# Altium PCB Emergency_Button_v2_1.PcbDoc
Units mm, origin at the board's own origin, x right, y up, seen from the top; angles counter-clockwise.
Board outline 52.15 x 52.96 mm, 2 copper layers (Top Layer, Bottom Layer); 43 components, 34 nets, 212 pads, 45 vias.
Unrouted connection lines stored in the file: 9.
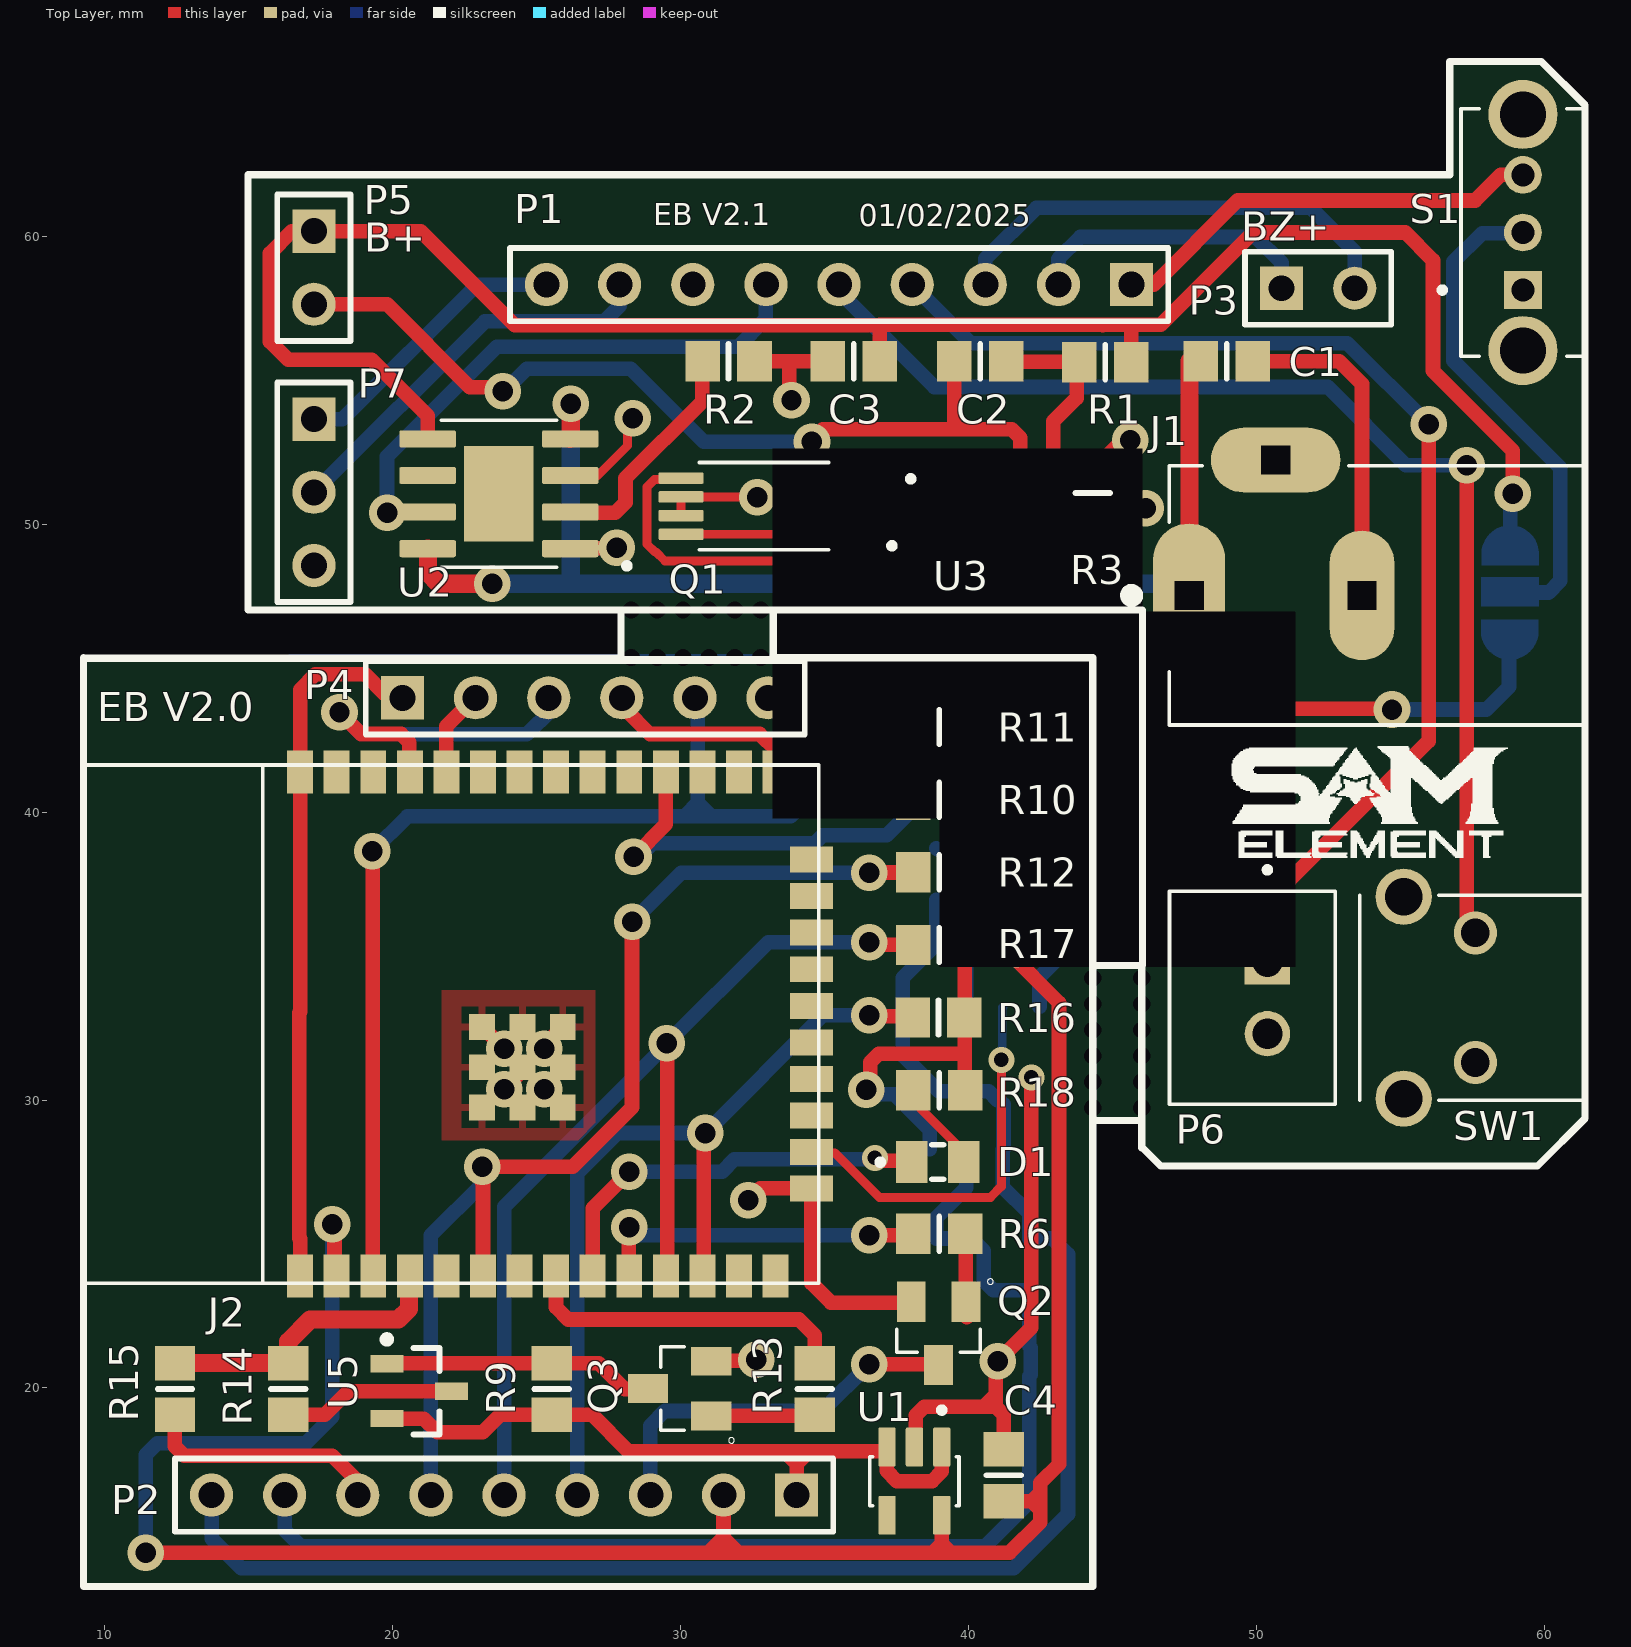
[diagram p0: Top Layer view]
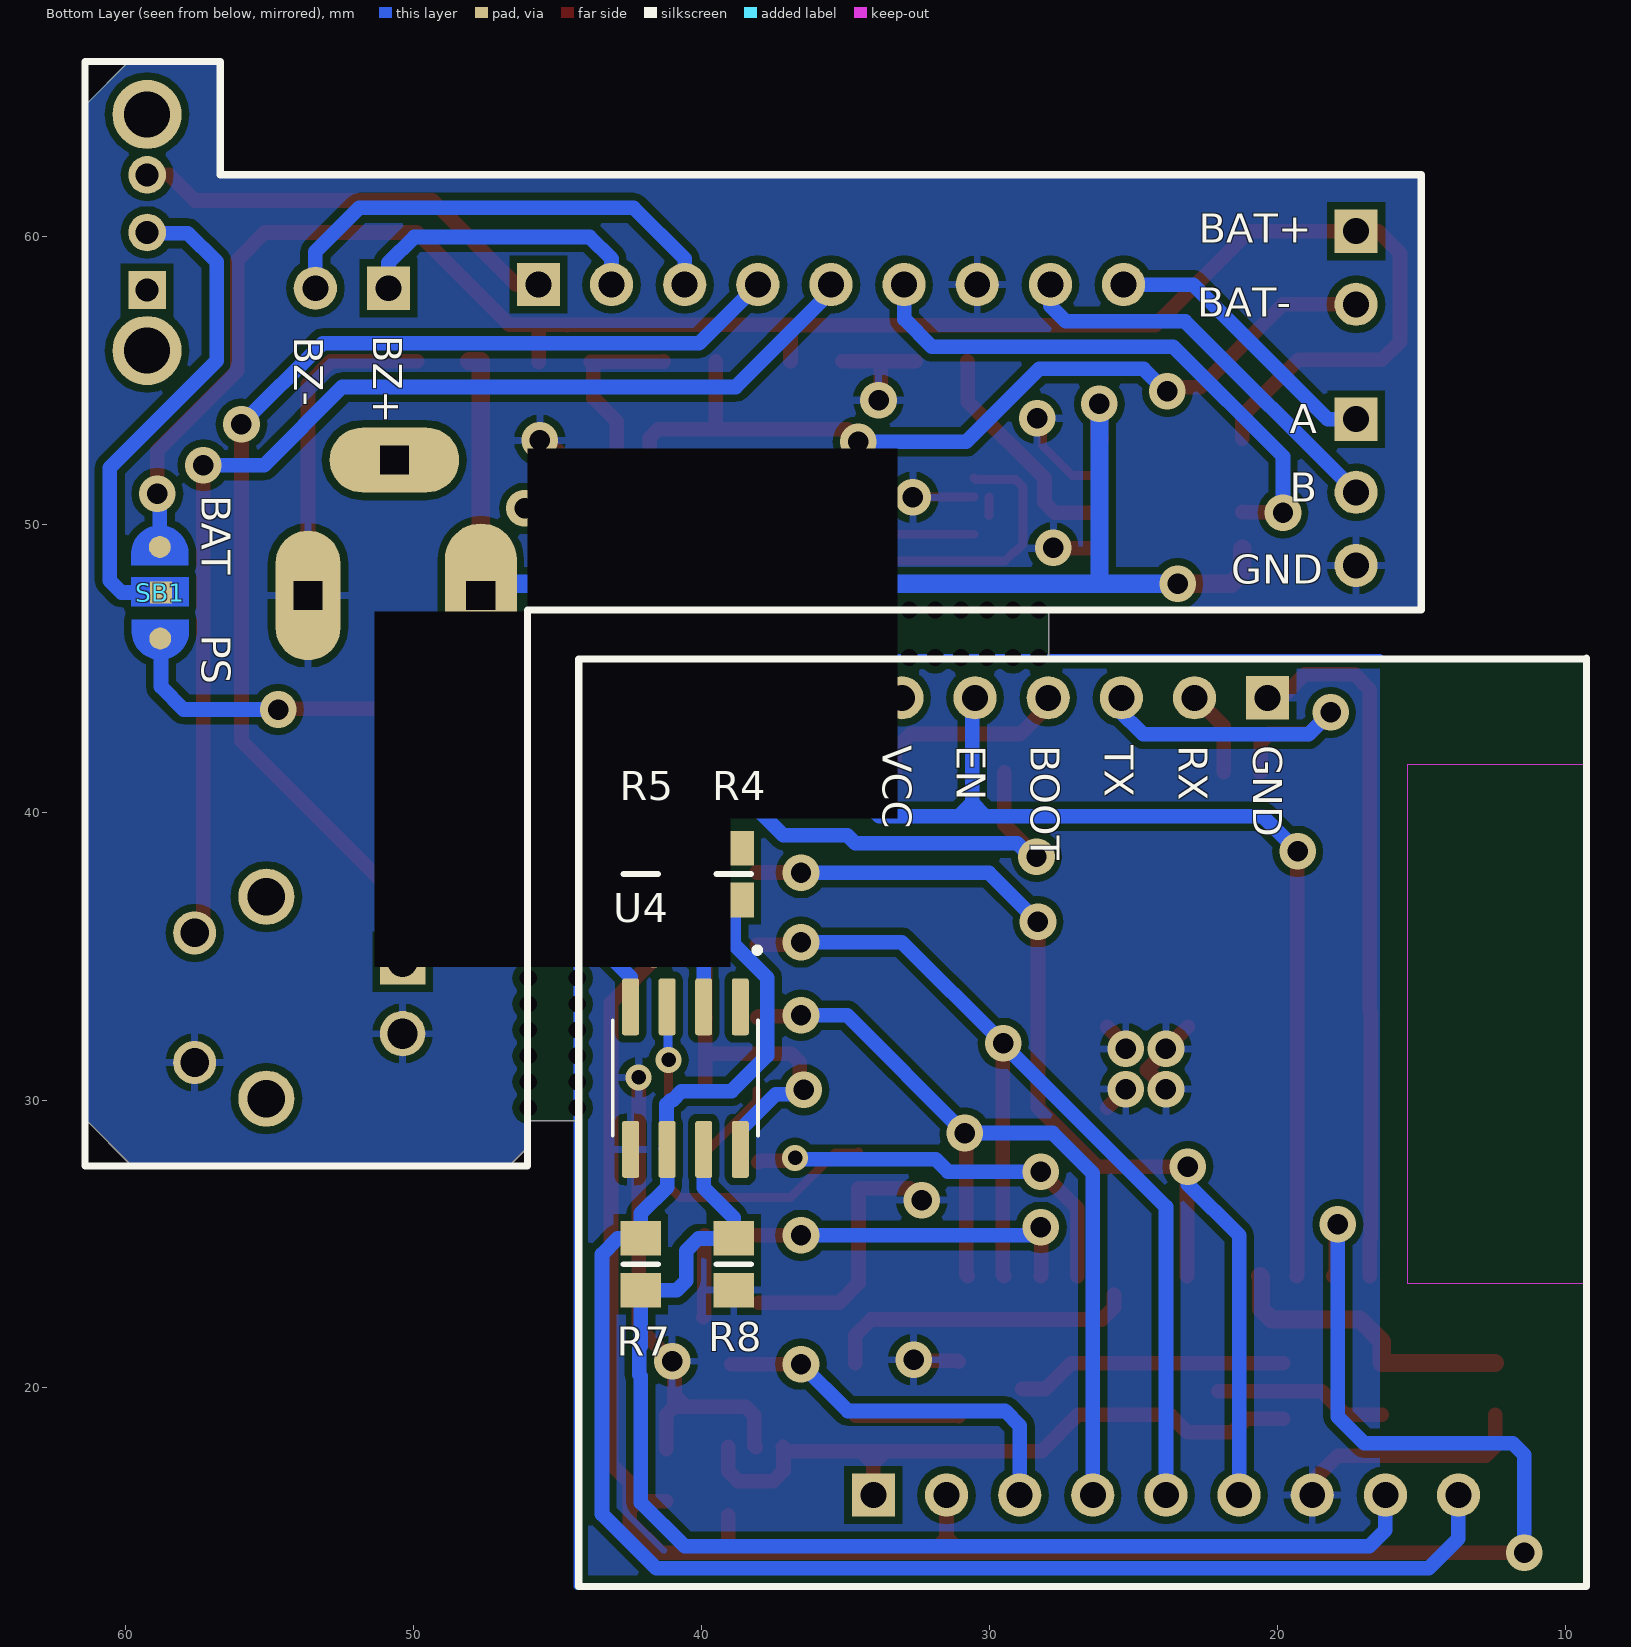
[diagram p1: Bottom Layer view, seen from below]

## Layer stack, top to bottom
Top Solder: solder mask 0.0102, Solder Resist, Dk 3.5
Top Layer: signal copper 0.0356
Dielectric 1: dielectric 0.32, FR-4, Dk 4.8
Bottom Layer: signal copper 0.0356
Bottom Solder: solder mask 0.0102, Solder Resist, Dk 3.5

## Board outline
15.011,62.128 56.718,62.128 56.718,66.065 59.893,66.065 61.417,64.541 61.417,29.337 59.792,27.711 46.685,27.711 46.025,28.372 46.025,29.286 44.323,29.286 44.323,13.106 9.296,13.106 9.271,13.132 9.271,45.339 27.94,45.339 27.94,47.015 15.011,47.015

## Design rules (kind name [scope] priority, off if disabled: settings)
Clearance [All] p1: gap=0.254 ignorepadtopadclearanceinfootprint=TRUE except(0: Arc-Hole Track-Hole SMDPad-Hole THPad-Hole Via-Hole Fill-Hole Poly-Hole Region-Hole Text-Hole)
PolygonConnect [All] p1: connectstyle=Relief reliefconductorwidth=0.254 reliefentries=4 polygonreliefangle="90 Angle" airgapwidth=0.254
RoutingVias [All] p1: holewidth=0.711 width=1.27 viastyle="Through Hole" minholewidth=0.711 minwidth=1.27 maxholewidth=0.711 maxwidth=1.27
SolderMaskExpansion [All] p1: expansion=0.102
Width [All] p1: maxlimit=2.54 minlimit=0.127 preferedwidth=0.508 minimp=50.000000 maximp=50.000000 favimp=50.000000
30 further rules are at their usual default settings.

## Components (designator, comment, footprint, x,y, rotation, side; value= is the part's Value field where it differs from the comment)
C1 "C 100n" 6-0805_N 48.971,55.651 r180 top value=100n
C2 "C 100n" 6-0805_N 40.411,55.651 r0 top value=100n
C3 "C 100n" 6-0805_N 36.017,55.651 r0 top value=100n
C4 "C 100n" 6-0805_N 41.23,16.967 r270 top value=100n
D1 "LED 0805" LEDC2012X70N 38.939,27.845 r0 top
J1 "PJ-002A" CUI_PJ-002A 47.67,47.523 r0 top
J2 "ESP32-WROOM-32E" ESP32-WROOM-32E 25.049,32.637 r90 top
P1 "PCB connector" HDR1X9 45.669,58.318 r180 top
P2 "PCB Connector" HDR1X9 34.036,16.281 r180 top
P3 "Buzzer" HDR1X2 50.876,58.191 r0 top
P4 "Flash port" HDR1X6 20.345,43.967 r0 top
P5 "BATT" HDR1X2 17.272,60.173 r270 top
P6 "BTN" JST_B2B-XH-A(LF)(SN) 49.86,33.553 r90 top
P7 "Header 3" HDR1X3 17.272,53.645 r270 top
Q1 "FS8205A" SOP65P640X120-8N 32.903,50.622 r180 top
Q2 "MMBT3904" SOT95P240X120-3N 38.964,21.896 r180 top
Q3 "MMBT3904" SOT95P240X120-3N 29.972,19.979 r90 top
R1 "R 100" 6-0805_N 44.755,55.626 r0 top value=100
R2 "R 1.2K" 6-0805_N 31.674,55.651 r0 top value=1.2K
R3 "R 1K" 6-0805_N 44.323,51.079 r90 top value=1K
R4 "R 10K" 6-0805_N 38.887,37.846 r90 bottom value=10K
R5 "R 10K" 6-0805_N 42.113,37.846 r270 bottom value=10K
R6 "R 1K" 6-0805_N 38.989,25.358 r0 top value=1K
R7 "R 120" 6-0805_N 42.113,24.293 r90 bottom value=120
R8 "R 10K" 6-0805_N 38.887,24.293 r90 bottom value=10K
R9 "R 10K" 6-0805_N 25.527,19.964 r270 top value=10K
R10 "R 10K" 6-0805_N 38.989,40.43 r0 top value=10K
R11 "R 10K" 6-0805_N 38.989,42.951 r0 top value=10K
R12 "R 10K" 6-0805_N 38.989,37.908 r0 top value=10K
R13 "R 1K" 6-0805_N 34.663,19.964 r270 top value=1K
R14 "R 10K" 6-0805_N 16.383,19.964 r270 top value=10K
R15 "R 10K" 6-0805_N 12.446,19.964 r90 top value=10K
R16 "R 10K" 6-0805_N 38.964,32.864 r0 top value=10K
R17 "R 10K" 6-0805_N 38.989,35.386 r0 top value=10K
R18 "R 1K" 6-0805_N 38.989,30.342 r0 top value=1K
S1 "EG1247" SW_EG1247 59.258,60.128 r90 top
SB1 "solder bridge 3pin" "SOLDER BRIDGE 3" -155.6,-40.107 r90 bottom
SW1 "Wifi Reset" SW_1825027-5 57.607,33.553 r90 top
U1 "AP2112K-3.3TRG1" SOT95P285X140-5N 38.125,16.764 r270 top
U2 "TP4056" SOP127P600X175-9N 23.698,51.054 r180 top
U3 "DW01A" SOT95P280X145-6N 40.553,50.622 r0 top
U4 "MAX3485ESA+" SOIC127P600X175-8N 40.564,30.759 r270 bottom
U5 "AO3401" SOT-23_N 20.93,19.888 r0 top

## Footprints (in the part's own frame and the unit in brackets; to place one, negate y for a bottom-side part, rotate by r counter-clockwise, add the part's x,y. Pads: shape width x height; smd on the part's side, far side on the other; paste and mask are expansions set on the pad)
6-0805_N [mm] "Chip Resistor, Body 2.0x1.2mm, IPC Medium Density"
  rect 1.2x1.4 smd: 1(-0.9,0) 2(0.9,0)
  silkscreen extent 0,-0.6 0,0.6, body extent -1.07,-0.7 1.07,0.7, height 0.7
CUI_PJ-002A [mm]
  oval 2.5x5 hole 1 square: 1(0,0)
  oval 2.25x4.5 hole 1 square: 2(6,0)
  oval 4.5x2.25 hole 1 square: 3(3,4.7)
  silkscreen extent -2.2,-4.5 13.7,4.5, body extent -0.7,-4.5 13.7,4.9, height 11
ESP32-WROOM-32E [mm]
  rect 1.5x0.9 smd: 1(-8.75,8.255) 2(-8.75,6.985) 3(-8.75,5.715) 4(-8.75,4.445) 5(-8.75,3.175) 6(-8.75,1.905) 7(-8.75,0.635) 8(-8.75,-0.635) 9(-8.75,-1.905) 10(-8.75,-3.175) 11(-8.75,-4.445) 12(-8.75,-5.715) 13(-8.75,-6.985) 14(-8.75,-8.255) 25(8.75,-8.255) 26(8.75,-6.985) 27(8.75,-5.715) 28(8.75,-4.445) 29(8.75,-3.175) 30(8.75,-1.905) 31(8.75,-0.635) 32(8.75,0.635) 33(8.75,1.905) 34(8.75,3.175) 35(8.75,4.445) 36(8.75,5.715) 37(8.75,6.985) 38(8.75,8.255)
  rect 0.9x1.5 smd: 15(-5.715,-9.505) 16(-4.445,-9.505) 17(-3.175,-9.505) 18(-1.905,-9.505) 19(-0.635,-9.505) 20(0.635,-9.505) 21(1.905,-9.505) 22(3.175,-9.505) 23(4.445,-9.505) 24(5.715,-9.505)
  rect 0.9x0.9 smd: GND@39(-2.9,1.935) GND@40(-1.5,1.935) GND@41(-0.1,1.935) GND@42(-2.9,0.535) GND@43(-1.5,0.535) GND@44(-0.1,0.535) GND@45(-2.9,-0.865) GND@46(-1.5,-0.865) GND@47(-0.1,-0.865)
  Keep-Out Layer region: 9,9.555 -9,9.555 -9,15.745 9,15.745
  silkscreen extent -9,-9.75 9,15.75, body extent -9,-9.83 9,15.67, height 3.25
HDR1X2 [mm] "Connector; Header; 2 Position"
  rect 1.5x1.5 hole 0.9: 1(0,0)
  round 1.5 hole 0.9: 2(2.54,0)
  silkscreen extent -1.27,-1.27 3.81,1.27
HDR1X3 [mm] "Connector; Header; 3 Position"
  rect 1.5x1.5 hole 0.9: 1(0,0)
  round 1.5 hole 0.9: 2(2.54,0) 3(5.08,0)
  silkscreen extent -1.27,-1.27 6.35,1.27
HDR1X6 [mm] "Connector; Header; 6 Position"
  rect 1.5x1.5 hole 0.9: 1(0,0)
  round 1.5 hole 0.9: 2(2.54,0) 3(5.08,0) 4(7.62,0) 5(10.16,0) 6(12.7,0)
  silkscreen extent -1.27,-1.27 13.97,1.27
HDR1X9 [mm] "Connector; Header; 9 Position"
  rect 1.5x1.5 hole 0.9: 1(0,0)
  round 1.5 hole 0.9: 2(2.54,0) 3(5.08,0) 4(7.62,0) 5(10.16,0) 6(12.7,0) 7(15.24,0) 8(17.78,0) 9(20.32,0)
  silkscreen extent -1.27,-1.27 21.59,1.27
JST_B2B-XH-A(LF)(SN) [mm]
  rect 1.575x1.575 / inner round 1.575 / far side rect 1.575x1.575 hole 1.05: 1(1.25,-0.525)
  round 1.575 hole 1.05: 2(-1.25,-0.525)
  silkscreen extent -3.7,-2.88 4.54,2.88, body extent -3.7,-2.88 3.7,2.88, height 7
LEDC2012X70N [mm]
  rect 1.1x1.45 smd: A(0.9,0) C(-0.9,0)
  silkscreen extent -2.1,-0.6 0.2,0.6, body extent -1,-0.63 1,0.63, height 0.7
SOIC127P600X175-8N [mm]
  rrect25% 1.97x0.59 smd: 1(-2.475,1.905) 2(-2.475,0.635) 3(-2.475,-0.635) 4(-2.475,-1.905) 5(2.475,-1.905) 6(2.475,-0.635) 7(2.475,0.635) 8(2.475,1.905)
  silkscreen extent -4.54,-2.52 2,2.59, body extent -3,-2.45 3,2.45, height 1.75
"SOLDER BRIDGE 3" [mil]
  round 30 smd: 1(3391,8441) 2(3516.31,8441.63)
  rect 30x30 smd: 3(3454,8440)
  Top Layer region: 3475,8401.99 3435,8401.99 3435,8480.73 3475,8480.73
  Top Layer region: 3397.3,8480.36 3416.99,8480.36 3416.99,8401.62 3397.3,8401.62
  Top Layer region: 3377.63,8460.67 3397.32,8460.67 3397.32,8421.3 3377.63,8421.3
  Top Layer region: 3530.37,8421.93 3510.69,8421.93 3510.69,8461.3 3530.37,8461.3
  Top Layer region: 3510.69,8402.26 3491,8402.26 3491,8481 3510.69,8481
  Top Layer lines w39.37: 3397.39,8421.7 cw(c3401.25,8441) 3383.18,8433.18 cw(c3401.25,8441) 3397.39,8460.3 ; 3510.61,8422.33 ccw(c3506.75,8441.63) 3526.43,8441.63 ccw(c3506.75,8441.63) 3510.61,8460.93
SOP65P640X120-8N [mm]
  rrect25% 1.56x0.4 smd: 1(-2.88,0.975) 2(-2.88,0.325) 3(-2.88,-0.325) 4(-2.88,-0.975) 5(2.88,-0.975) 6(2.88,-0.325) 7(2.88,0.325) 8(2.88,0.975)
  silkscreen extent -4.54,-1.52 2.25,1.52, body extent -3.2,-1.46 3.2,1.47, height 1.2
SOP127P600X175-9N [mm]
  rrect25% 1.97x0.6 smd: 1(-2.475,1.905) 2(-2.475,0.635) 3(-2.475,-0.635) 4(-2.475,-1.905) 5(2.475,-1.905) 6(2.475,-0.635) 7(2.475,0.635) 8(2.475,1.905)
  rect 2.413x3.302 smd paste-3: 9(0,0)
  silkscreen extent -4.54,-2.55 2,2.6, body extent -3,-2.45 3,2.45, height 1.75
SOT95P240X120-3N [mm]
  rect 1x1.4 smd: 1(-0.95,-1.1) 2(0.95,-1.1) 3(0,1.1)
  silkscreen extent -1.9,-1.9 1.45,0.65
SOT95P280X145-6N [mm]
  rect 1.21x0.59 smd: 1(-1.255,0.95) 2(-1.255,0) 3(-1.255,-0.95) 4(1.255,-0.95) 5(1.255,0) 6(1.255,0.95)
  silkscreen extent -2.65,0.85 -2.46,1.05, body extent -1.4,-1.45 1.4,1.45, height 1.45
SOT95P285X140-5N [mm]
  rrect15% 1.35x0.6 smd: 1(-1.185,0.95) 2(-1.185,0) 3(-1.185,-0.95) 4(1.185,-0.95) 5(1.185,0.95)
  silkscreen extent -2.57,-1.55 0.85,1.55, body extent -1.4,-1.5 1.4,1.5, height 1.4
SOT-23_N [mm] "SOT23, 3-Leads, Body 2.9x1.3mm, Pitch 0.95mm, Lead Span 2.5mm, IPC Medium Density"
  rect 1.15x0.6 smd: 1(-1.125,0.95) 2(-1.125,-0.95) 3(1.125,0)
  silkscreen extent -1.25,-1.5 0.7,1.92, body extent -0.7,-1.5 0.7,1.5, height 1.1
SW_1825027-5 [mm]
  round 1.498 hole 0.99: 1(-2.25,0) 2(2.25,0)
  round 1.95 hole 1.3: S1(-3.505,2.49) S2(3.505,2.49)
  silkscreen extent -3.55,-3.86 3.55,4.01, body extent -4.2,-5.98 4.2,3.87, height 7.26
SW_EG1247 [mm]
  rect 1.308x1.308 / inner round 1.308 / far side rect 1.308x1.308 hole 0.8: 1(-2,0)
  round 1.308 hole 0.8: 2(0,0) 3(2,0)
  round 2.4 hole 1.6: SH1(-4.1,0) SH2(4.1,0)
  silkscreen extent -4.3,-2.15 4.3,2.9, body extent -4.3,-6.15 4.3,2.15, height 4.7

## Part data
C1 C2 C3 C4: library part Cap, "Capacitor", LatestRevisionDate=17-Jul-2002, LatestRevisionNote="Re-released for DXP Platform.", PackageDescription="Radial Cap, Thru-Hole; 2 Leads; 0.3 in Pin Spacing", PackageReference=RAD-0.3, Published=8-Jun-2000, Publisher="Altium Limited"
D1: library part 597-3305-607F, "LED Red", Package=None, Availability=Unavailable, MP=597-3305-607F, Price=None
J1: "DC Power Jack", Package=None, Availability="In Stock", Check_prices=https://www.snapeda.com/parts/PJ-002A/CUI+Devices/view-part/?ref=eda, CUI_purchase_URL=https://www.cuidevices.com/product/interconnect/connectors/dc-power-connectors/jacks/pj-002a?utm_source=snapeda.com&utm_medium=referral&utm_campaign=snapedaBOM, MF="CUI Devices", MP=PJ-002A, Price=None, Purchase-URL=https://pricing.snapeda.com/search/part/PJ-002A/?ref=eda, SnapEDA_Link=https://www.snapeda.com/parts/PJ-002A/CUI+Devices/view-part/?ref=snap
J2: Package="SMD-44 Espressif Systems", Availability="In Stock", Check_prices=https://www.snapeda.com/parts/ESP32-WROOM-32E/Espressif+Systems/view-part/?ref=eda, MF="Espressif Systems", MP=ESP32-WROOM-32E, Price=None, SnapEDA_Link=https://www.snapeda.com/parts/ESP32-WROOM-32E/Espressif+Systems/view-part/?ref=snap
P1 P2: library part "Header 9", "Header, 9-Pin", LatestRevisionDate=17-Jul-2002, LatestRevisionNote="Re-released for DXP Platform.", Publisher="Altium Limited"
P3 P5: library part "Header 2", "Header, 2-Pin", LatestRevisionDate=17-Jul-2002, LatestRevisionNote="Re-released for DXP Platform.", Publisher="Altium Limited"
P4: library part "Header 6", "Header, 6-Pin", LatestRevisionDate=17-Jul-2002, LatestRevisionNote="Re-released for DXP Platform.", Publisher="Altium Limited"
P6: library part "Header 2", "JST-XH, 2-Pin", LatestRevisionDate=17-Jul-2002, LatestRevisionNote="Re-released for DXP Platform.", Publisher="Altium Limited"
P7: "Header, 3-Pin", LatestRevisionDate=17-Jul-2002, LatestRevisionNote="Re-released for DXP Platform.", Publisher="Altium Limited"
Q1: "N/A", Package=Package, Availability="Not in stock", Check_prices=https://www.snapeda.com/parts/FS8205A/Fortune+Semiconductor/view-part/?ref=eda, MF="Fortune Semiconductor", MP=FS8205A, Price=None, SnapEDA_Link=https://www.snapeda.com/parts/FS8205A/Fortune+Semiconductor/view-part/?ref=snap
Q2 Q3: "Bipolar _BJT_ Transistor NPN 40V 200mA 270MHz 350mW Surface Mount SOT-23-3", Package="SOT-23-3 Taiwan Semiconductor", Availability=Unavailable, MF=STMicroelectronics, MP=MMBT3904, Price=None, SnapEDA_Link=https://www.snapeda.com/parts/MMBT3904/STMicroelectronics/view-part/2875870/?ref=snap
R1 R2 R3 R4 R5 R6 R7 R8 R9 R10 R11 R12 R13 R14 R15 R16 R17 R18: library part Res1, "Resistor", LatestRevisionDate=17-Jul-2002, LatestRevisionNote="Re-released for DXP Platform.", PackageDescription="Axial Device, Thru-Hole; 2 Leads; 0.3 in Pin Spacing", PackageReference=AXIAL-0.3, Published=8-Jun-2000, Publisher="Altium Limited"
S1: "Slide Switch SPDT Through Hole, Right Angle", Package=None, Availability="In Stock", Check_prices=https://www.snapeda.com/parts/EG1247/E-Switch/view-part/?ref=eda, MF=E-Switch, MP=EG1247, Price=None, Purchase-URL=https://pricing.snapeda.com/search/part/EG1247/?ref=eda, SnapEDA_Link=https://www.snapeda.com/parts/EG1247/E-Switch/view-part/?ref=snap
SW1: library part 1825027-5, "Tactile Switch Right Angle", Package=None, Check_prices=https://www.snapeda.com/parts/1825027-5/TE+Connectivity+ALCOSWITCH+Switches/view-part/?ref=eda, Digi-Key_Part_Number=450-1662-ND, EU_RoHS_Compliance=Compliant, MF="TE Connectivity", MP=1825027-5, Purchase-URL=https://pricing.snapeda.com/search/part/1825027-5/?ref=eda, SnapEDA_Link=https://www.snapeda.com/parts/1825027-5/TE+Connectivity+ALCOSWITCH+Switches/view-part/?ref=snap
U1: "Linear Voltage Regulator Output 600mA", Package="SOT-753 Diodes Inc.", Availability="In Stock", Check_prices=https://www.snapeda.com/parts/AP2112K-3.3TRG1/Diodes+Inc./view-part/?ref=eda, MF="Diodes Inc.", MP=AP2112K-3.3TRG1, Price=None, Purchase-URL=https://pricing.snapeda.com/search/part/AP2112K-3.3TRG1/?ref=eda, SnapEDA_Link=https://www.snapeda.com/parts/AP2112K-3.3TRG1/Diodes+Inc./view-part/?ref=snap
U2: "Complete single cell Li-Ion battery with a constant current / constant voltage linear charger", Package=Package, Availability="Not in stock", Check_prices=https://www.snapeda.com/parts/TP4056/NanJing+Top+Power+ASIC+Corp./view-part/?ref=eda, MF="NanJing Top Power ASIC Corp.", MP=TP4056, Price=None, SnapEDA_Link=https://www.snapeda.com/parts/TP4056/NanJing+Top+Power+ASIC+Corp./view-part/?ref=snap
U3: "One Cell Lithium-ion/Polymer Battery Protection IC", Package="SOT-23-6 Fortune Semiconductor", Check_prices=https://www.snapeda.com/parts/DW01A/Fortune+Semiconductor/view-part/?ref=eda, MF="Fortune Semiconductor", MP=DW01A, SnapEDA_Link=https://www.snapeda.com/parts/DW01A/Fortune+Semiconductor/view-part/?ref=snap
U4: "half duplex RS485", Package="SOIC-8 Maxim", Availability=Unavailable, MF="Maxim Integrated", MP=MAX3485ESA+, Price=None, SnapEDA_Link=https://www.snapeda.com/parts/MAX3485ESA%2B/Maxim%20Integrated/view-part/225576/?ref=snap
U5: "P-Channel 30V 4A (Ta) 1.4W (Ta) Surface Mount SOT-23-3L", Package="SOT-23-3 Alpha &amp; Omega Semiconductor", Arrow_Electronics-Purchase-URL=https://snapeda.com/shop?store=Arrow+Electronics&id=4795619, Availability=Warning, BuyPart=https://www.snapeda.com/parts/AO3401/Alpha%20&%20Omega%20Semiconductor/view-part/4795619/?ref=eda, MF="Alpha & Omega Semiconductor", MP=AO3401, Price=None, SnapEDA_Link=https://www.snapeda.com/parts/AO3401/Alpha%20&%20Omega%20Semiconductor/view-part/4795619/?ref=snap

## Free pads (board coordinates)
  round 0 hole 0.6: 2(28.291,45.364) 2(28.291,47.015) 2(29.191,45.364) 2(29.191,47.015) 2(30.091,45.364) 2(30.091,47.015) 2(30.991,45.364) 2(30.991,47.015) 2(31.891,45.364) 2(31.891,47.015) 2(32.791,45.364) 2(32.791,47.015) 2(44.323,29.736) 2(44.323,30.636) 2(44.323,31.536) 2(44.323,32.436) 2(44.323,33.336) 2(44.323,34.236) 2(46.025,29.736) 2(46.025,30.636) 2(46.025,31.536) 2(46.025,32.436) 2(46.025,33.336) 2(46.025,34.236)
  round 0 hole 12.82 square: 3(39.624,46.203)
  round 0 hole 12.344 square: 3(45.187,40.792)

## Via types
v1: diameter 1.27, hole 0.711, Top Layer to Bottom Layer, 42 vias
v2: diameter 0.9, hole 0.5, Top Layer to Bottom Layer, 3 vias

## Nets (pads, with @x,y where several pads share a name; then routed paths per layer and width w, separated by ;. In a path a pad name is that pad's centre, name@x,y a point inside that pad or via, vN(x,y) a via of type N, cw(c..) or ccw(c..) an arc to the next point about the centre after c; other vN are vias at no path point)
485_EN: J2.16 U4.3 | length 13.7
  Top Layer w0.305: J2.16 34.578,28.169 35.357,28.169 36.906,26.619 40.767,26.619 41.148,27 v2(41.148,31.394)
  Bottom Layer w0.305: v2(41.148,31.394) 41.173,31.42 41.173,33.209 U4.3
+5: C1.2 J1.1 SB1.1 U2.4 U2.8 | length 60.3
  Top Layer w0.508: 48.666,43.586 54.686,43.586 v1(54.712,43.561)
  Top Layer w0.635: U2.8 21.234,49.138 21.234,48.302 21.606,47.93 v1(23.47,47.93) ; U2.4 26.176,52.959 26.193,52.977 26.193,54.173 v1(26.187,54.178) ; C1.2 47.676,55.651 47.676,47.529 J1.1 48.027,47.167 48.027,44.226 48.666,43.586
  Bottom Layer w0.508: v1(54.712,43.561) 57.988,43.561 58.776,44.348 58.776,45.653 58.602,45.826 SB1.1
  Bottom Layer w0.635: v1(23.47,47.93) 26.213,47.93 ; v1(26.187,54.178) 26.187,47.955 26.213,47.93 ; J1.1 47.264,47.93 26.213,47.93
B+: C3.2 P5.1 R1.2 SB1.2 U2.5 | length 67.9
  Top Layer w0.508: U2.5 21.223,53.758 19.279,55.702 16.383,55.702 15.748,56.337 15.748,59.411 16.51,60.173 P5.1 20.98,60.173 24.246,56.907 36.917,56.907 ; C3.2 36.917,56.907 ; 44.664,56.91 44.653,56.921 ; R1.2 45.655,56.907 45.669,56.921 ; v1(58.903,51.054) 58.903,52.553 56.134,55.321 56.134,59.163 55.169,60.128 49.892,60.128 46.685,56.921 45.669,56.921 ; 36.917,56.907 36.932,56.921 44.653,56.921 ; 44.653,56.921 45.669,56.921
  Bottom Layer w0.508: SB1.2 58.817,49.465 58.817,50.968 v1(58.903,51.054)
B-: C2.1 P5.2 Q1.2 Q1.3 U3.6 | length 34.3
  Top Layer w0.305: Q1.2 35.783,50.622 ; Q1.3@35.783,50.889 Q1.3 ; 39.511,53.326 39.548,53.289
  Top Layer w0.508: P5.2 19.812,57.633 22.689,54.756 23.679,54.756 v1(23.825,54.61) ; 34.036,52.375 34.036,51.187 34.601,50.622 35.783,50.622 ; v1@34.95,53.289 39.548,53.289 41.51,53.289 41.808,52.992 U3.6 ; 39.511,53.326 C2.1
  Bottom Layer w0.508: v1(23.825,54.61) 23.87,54.61 24.658,55.397 28.27,55.397 30.81,52.857 v1(34.569,52.857)
BAT_ADC: J2.4 R14.1 R15.2 | length 10.5
  Top Layer w0.635: R15.2 R14.1 16.383,21.615 17.145,22.377 20.202,22.377 20.574,22.749 20.574,23.857 J2.4
BAT_CHRG: J2.6 P1.6 P2.6 R12.1 U2.7 | length 58.6
  Top Layer w0.508: v1(19.812,50.394) 19.825,50.406 21.211,50.406 U2.7 ; J2.6 23.144,27.076 23.114,27.106 v1(23.114,27.686) 26.264,27.686 28.321,29.743 v1(28.321,36.195) ; v1@36.297,37.897 36.302,37.902 38.084,37.902 R12.1
  Bottom Layer w0.508: v1(19.812,50.394) 19.812,52.349 23.622,56.159 32.004,56.159 32.969,57.125 P1.6 ; P2.6 21.336,25.298 23.114,27.076 v1(23.114,27.686) ; v1(28.321,36.195) 30.023,37.897 v1@36.297,37.897
  other v1: 36.551,37.897
BAT_EN: J2.8 R13.1 | length 10.8
  Top Layer w0.508: J2.8@25.679,23.241 25.679,22.809 26.111,22.377 34.119,22.377 34.671,21.826 R13.1@34.671,20.864
BTN_EM: J2.12 P1.4 P2.4 P6.1 R16.1 | length 71.1
  Top Layer w0.508: J2.12 30.813,23.936 30.813,28.806 v1(30.861,28.854) ; v1(36.551,32.944) 36.591,32.904 38.024,32.904 R16.1 ; P6.1 50.385,36.872 55.982,42.469 v1(55.982,53.467)
  Bottom Layer w0.508: P2.4 26.416,27.457 27.813,28.854 v1(30.861,28.854) 34.95,32.944 v1(36.551,32.944) ; P1.4 40.081,56.286 53.162,56.286 v1(55.982,53.467)
BUZ2: P1.3 P2.3 P3.2 Q2.3 | length 29.7
  Top Layer w0.508: v1(36.551,20.828) Q2.3@38.964,20.828
  Bottom Layer w0.508: P2.3 28.956,18.694 29.464,19.202 34.925,19.202 v1(36.551,20.828) ; P1.3 40.589,59.207 42.367,60.985 51.892,60.985 53.416,59.461 P3.2
BUZZ: J2.10 R6.1 | length 11.7
  Top Layer w0.508: v1(28.219,25.578) 28.209,25.567 28.209,23.902 J2.10 ; v1@36.449,25.298 R6.1@38.089,25.298
  Bottom Layer w0.508: v1(28.219,25.578) 28.499,25.298 v1@36.449,25.298
  other v1: 36.551,25.298
ESP_BOOT: J2.25 P4.4 R11.1 | length 12.5
  Top Layer w0.508: P4.4@28.067,44.094 28.067,43.586 28.944,42.709 32.754,42.709 33.304,42.159 J2.25 34.783,41.387 36.347,42.951 R11.1
ESP_EN: J2.3 P4.5 R10.1 | length 38.7
  Top Layer w0.508: v1(19.304,38.633) 19.319,38.618 19.319,23.902 J2.3 ; v1@36.297,40.462 36.313,40.446 38.073,40.446 R10.1
  Bottom Layer w0.508: v1(19.304,38.633) 20.523,39.853 30.607,39.853 ; P4.5@30.607,44.094 30.607,39.853 ; v1@36.449,40.462 36.297,40.462 34.442,40.462 33.833,39.853 30.607,39.853
  other v1: 36.551,40.462
GND: C1.1 C3.1 C4.1 J1.2 J2.1 J2.15 J2.38 J2.GND@39 J2.GND@40 J2.GND@41 J2.GND@42 J2.GND@43 J2.GND@44 J2.GND@45 J2.GND@46 J2.GND@47 P1.7 P2.7 P4.1 P6.2 P7.3 Q1.6 Q1.7 Q2.2 Q3.2 R2.2 R3.2 R8.1 R15.1 SW1.1 U1.2 U2.1 U2.3 U4.5 | length 92.1
  Top Layer w0.305: U2.3 27.127,51.689 28.162,52.724 28.162,53.486 v1(28.346,53.67) ; Q1.7 Q1.6 ; Q1.6@30.546,50.947 30.557,50.937 32.654,50.937 v1(32.664,50.927)
  Top Layer w0.508: R15.1 12.446,17.983 12.776,17.653 17.907,17.653 18.796,16.764 P2.7 ; J2.1 16.794,25.176 16.764,25.206 16.764,33.034 16.794,33.064 J2.38 16.794,44.251 17.323,44.78 19.05,44.78 19.736,44.094 P4.1@20.447,44.094 ; 23.114,32.537 v1(23.876,31.775) 23.876,31.712 24.543,31.045 v1(23.876,30.378) ; v1(25.273,30.378) 25.914,29.737 ; v1(25.273,31.775) 25.273,31.896 25.914,32.537 ; U2.1 26.186,49.162 27.775,49.162 v1(27.788,49.174) ; Q3.2@31.072,20.914 31.105,20.947 32.606,20.947 v1(32.639,20.98) ; v1(32.36,26.518) 32.361,26.518 32.78,26.936 34.54,26.936 J2.15 34.554,23.637 35.23,22.962 Q2.2@38.014,22.962 ; R2.2 33.782,55.651 ; v1(33.858,54.305) 33.782,54.381 33.782,55.651 ; C3.1 33.782,55.651 ; U1.2 38.171,17.995 38.171,19.057 38.469,19.355 40.945,19.355 ; C4.1 41.23,19.07 40.945,19.355 ; v2(42.189,30.785) 42.189,22.098 v1(41.021,20.93) 40.945,20.853 40.945,19.355 ; R3.2 44.423,51.979 45.206,52.762 45.473,52.762 v1(45.618,52.908) ; C1.1 52.883,55.651 53.67,54.864 J1.2 J1.2@53.67,46.815
LED: D1.C J2.9 | length 14
  Top Layer w0.508: J2.9 26.954,26.243 v1(28.219,27.508) ; v2@36.573,27.893 37.992,27.893 D1.C
  Bottom Layer w0.508: v1(28.219,27.508) 31.445,27.508 31.877,27.94 v2@36.449,27.94
  other v2: 36.754,27.991
NetC2_2: C2.2 R1.1 U3.5 | length 8.9
  Top Layer w0.508: C2.2 41.324,55.639 43.842,55.639 R1.1 43.764,55.535 43.764,54.381 42.951,53.569 42.951,50.961 42.654,50.663 41.849,50.663 U3.5
NetD1_A: D1.A R18.1 | length 3.2
  Top Layer w0.305: R18.1 38.089,29.958 39.839,28.208 D1.A
NetQ1_1: Q1.1 Q1.8 | length 5.8
  Top Layer w0.305: Q1.8@30.546,49.647 Q1.1@36.306,49.647
NetQ2_1: Q2.1 R6.2 | length 2.9
  Top Layer w0.508: R6.2@39.889,25.298 39.914,25.273 39.914,22.486 Q2.1@39.939,22.461
NetQ3_1: Q3.1 R13.2 | length 3.6
  Top Layer w0.508: Q3.1@31.072,19.014 31.097,19.039 34.646,19.039 R13.2@34.671,19.064
NetQ3_3: Q3.3 R9.1 U5.1 | length 9.4
  Top Layer w0.508: U5.1@19.805,20.864 R9.1 27.167,20.864 28.067,19.964 Q3.3@28.872,19.964
NetR2_1: R2.1 U2.2 | length 8
  Top Layer w0.508: U2.2@26.249,50.394 27.737,50.394 28.092,50.749 28.092,51.587 30.759,54.254 30.759,55.637 R2.1
NetR3_1: R3.1 U3.2 | length 12.2
  Top Layer w0.508: v1(37.694,50.419) 37.9,50.419 38.062,50.581 39.257,50.581 U3.2 ; R3.1 45.579,50.179 45.946,50.546 v1(46.152,50.546)
  Bottom Layer w0.508: v1(37.694,50.419) 37.757,50.482 46.088,50.482 v1(46.152,50.546)
NetR14_2: R14.2 U5.3 | length 6
  Top Layer w0.508: R14.2 17.642,19.064 18.466,19.888 U5.3
NetS1_2: S1.2 SB1.3 | length 17.4
  Bottom Layer w0.508: SB1.3 60.147,47.625 60.554,48.031 60.554,51.959 56.845,55.668 56.845,59.106 57.842,60.103 59.233,60.103 S1.2
OC: Q1.5 U3.3 | length 15.3
  Top Layer w0.305: Q1.5@30.546,51.597 30.503,51.554 29.104,51.554 28.837,51.286 28.837,49.623 28.837,49.308 28.854,49.291 29.104,49.041 29.14,49.041 29.464,48.717 38.938,48.717 39.298,49.077 U3.3
OD: Q1.4 U3.1 | length 3
  Top Layer w0.305: Q1.4@36.306,51.597 36.319,51.585 39.285,51.585 U3.1
OUT+1: P1.1 P2.1 R9.2 S1.3 U1.1 U1.3 U5.2 | length 39.1
  Top Layer w0.508: U5.2 21.092,18.938 21.565,18.466 23.139,18.466 23.738,19.064 R9.2 26.935,19.064 28.194,17.805 33.985,17.805 ; P2.1 34.036,17.755 33.985,17.805 ; U1.3 U1.3@37.16,17.934 ; U1.1 39.075,17.104 38.737,16.766 37.52,16.766 37.16,17.125 U1.3@37.16,17.934 ; P1.1@45.542,58.318 P1.1 46.431,58.318 49.352,61.239 57.607,61.239 58.496,62.128 S1.3 ; 33.985,17.805 37.032,17.805 U1.3@37.16,17.934
RS485_A: P1.9 P2.9 P7.1 R4.1 R7.2 U4.6 | length 68.2
  Bottom Layer w0.508: P2.9 13.729,16.268 13.729,14.769 14.757,13.741 16.374,13.741 41.58,13.741 43.459,15.621 43.459,24.645 42.908,25.197 42.117,25.197 R7.2 42.113,26.06 41.199,26.975 U4.6 U4.6@41.219,28.305 ; P7.1 18.263,53.645 22.936,58.318 P1.9 ; R4.1 38.887,35.418 37.719,34.25 37.719,31.547 38.965,30.301 40.701,30.301 41.005,29.997 41.072,29.997 41.219,29.85 U4.6@41.219,28.305 ; U4.6@41.24,28.325 U4.6@41.219,28.305
RS485_B: P1.8 P2.8 P7.2 R7.1 R8.2 U4.7 | length 57.5
  Bottom Layer w0.508: P2.8 16.256,15.062 16.815,14.503 40.593,14.503 42.113,16.023 42.113,20.405 42.164,20.456 42.164,21.403 42.113,21.454 R7.1 40.869,23.393 40.538,23.724 40.538,24.765 40.11,25.193 R8.2 38.887,25.908 39.929,26.949 U4.7 ; P7.2 23.216,57.048 27.356,57.048 27.889,57.582 P1.8
RST_WIFI: J2.11 P1.5 P2.5 R17.1 SW1.2 | length 77.1
  Top Layer w0.508: J2.11 29.543,23.936 29.543,31.951 v1(29.527,31.966) ; v1@36.22,35.484 36.307,35.397 38.078,35.397 R17.1 ; v1(57.302,52.045) 57.302,36.108 SW1.2
  Bottom Layer w0.508: P2.5 23.876,26.289 29.527,31.941 v1(29.527,31.966) 33.045,35.484 v1@36.22,35.484 ; P1.5 35.509,58.064 38.811,54.762 52.476,54.762 55.194,52.045 v1(57.302,52.045)
  other v1: 36.551,35.484
RX0: J2.34 P4.2 | length 3.2
  Top Layer w0.508: J2.34 21.874,42.981 P4.2@22.987,44.094
TX0: J2.35 P4.3 | length 12.5
  Top Layer w0.508: v1(18.161,43.459) 18.911,42.709 20.308,42.709 20.589,42.428 20.589,41.402 J2.35
  Bottom Layer w0.508: v1(18.161,43.459) 18.923,42.697 24.663,42.697 25.527,43.561 P4.3@25.527,44.094
TX2: J2.28 R5.1 U4.4 | length 26.1
  Top Layer w0.508: v1(28.372,38.456) 29.494,39.578 J2.28
  Bottom Layer w0.508: v1(28.372,38.456) 28.578,38.456 29.035,38.913 34.671,38.913 34.95,39.192 37.16,39.192 38.049,40.081 41.605,40.081 42.062,39.624 42.062,38.797 R5.1 42.2,38.659 43.18,38.659 43.663,38.176 43.663,35.458 42.469,34.265 U4.4
VCC: C4.2 J2.2 P1.2 P2.2 P3.1 P4.6 R4.2 R5.2 R10.2 R11.2 R12.2 R16.2 R17.2 R18.2 U1.5 U4.2 U4.8 | length 126.4
  Top Layer w0.508: v1(11.43,14.275) 31.496,14.275 ; v1(17.907,25.679) 17.986,25.601 17.986,23.966 J2.2 ; P2.2@31.686,16.092 P2.2 31.496,14.275 ; P4.6@33.147,44.094 33.426,44.374 39.599,44.374 39.878,44.094 39.878,42.962 R11.2 R10.2 R12.2 39.889,35.89 40.068,35.461 40.221,35.308 41.578,35.308 v1(41.656,35.23) ; v1(36.449,30.353) 36.595,30.499 36.595,31.305 36.892,31.603 39.876,31.603 ; U1.5 39.075,14.31 39.04,14.275 ; R18.2 39.876,30.355 39.876,31.603 ; R17.2 39.876,35.373 39.876,32.877 R16.2 39.876,32.851 39.876,31.603 ; C4.2 42.48,16.067 ; v1@41.401,35.131 43.147,33.385 43.147,17.36 42.494,16.706 42.494,15.342 41.427,14.275 39.04,14.275 ; 31.496,14.275 39.04,14.275
  Bottom Layer w0.508: v1(11.43,14.275) 11.43,17.686 11.829,18.085 16.993,18.085 17.907,18.999 v1(17.907,25.679) ; v1(36.449,30.353) 36.595,30.207 37.426,30.207 38.659,28.974 U4.8 ; R4.2 38.924,38.71 39.929,38.71 40.538,38.1 40.538,36.982 ; U4.2 39.929,34.747 40.538,35.357 ; v1(41.656,35.23) 41.529,35.357 40.538,35.357 ; R5.2 40.575,36.946 40.538,36.982 ; P1.2 43.129,59.207 43.891,59.969 49.987,59.969 50.876,59.08 P3.1 ; 40.538,35.357 40.538,36.982
pads on no net: J1.3 J2.5 J2.7 J2.13 J2.14 J2.17 J2.18 J2.19 J2.20 J2.21 J2.22 J2.23 J2.24 J2.26 J2.27 J2.29 J2.30 J2.31 J2.32 J2.33 J2.36 J2.37 S1.1 S1.SH1 S1.SH2 SW1.S1 SW1.S2 U1.4 U2.6 U2.9 U3.4 U4.1
copper on no net: | length 87.8
  Bottom Layer w0.254: 16.447,45.364 44.323,45.364 44.323,13.106 16.637,13.106

## Polygon pours and split planes (outlines as drawn)
GND on Bottom Layer "Bottom Layer-GND 1" (solid, pour order 0): 16.447,45.364 16.447,13.106 44.386,13.106 44.323,45.364
GND on Bottom Layer "Bottom Layer-GND" (solid, pour order 8): 15.011,62.128 15.011,47.015 46.05,47.015 46.05,28.346 46.685,27.711 59.766,27.711 61.417,29.362 61.417,64.541 59.893,66.065 56.718,66.065 56.718,62.128
no net on Bottom Layer "Bottom Layer-No Net" (solid, pour order 2): 53.937,26.886
GND on Top Layer "Top Layer-GND" (solid, pour order 6): 21.717,33.807 27.051,33.807 27.051,28.6 21.717,28.6
no net on Top Layer "Top Layer-No Net" (solid, pour order 4): 61.747,13.233

## Other copper
Top Layer:
  region net OUT+1: 34.036,17.018 34.785,17.767 33.287,17.767
  region net GND: 40.945,20.104 40.195,19.355 40.945,19.355
  region net GND: 40.132,19.406
  region net VCC: 41.855,16.067 42.604,15.318 42.604,16.816
  region net VCC: 39.075,14.945 38.326,14.195 39.825,14.195
  region net B+: 34.874,55.08
  region net VCC: 31.039,14.707
  region net VCC: 31.483,15.151 30.734,14.402 32.233,14.402
Bottom Layer:
  region net ESP_EN: 30.607,40.665 29.82,39.878 31.356,39.916

## Silkscreen, mask and mechanical layers (free items; w line width, h text height)
Top Overlay:
  drawing of 46 lines, arcs and shapes, not listed
  text "EB V2.1" at 29.058,60.376 h0.76
  text "01/02/2025" at 36.195,60.35 h0.76
  text "BZ+" at 49.479,59.842 h1.02
  text "B+" at 19.025,59.461 h1.02
  text "EB V2.0" at 9.754,43.155 h1.02
Bottom Overlay:
  lines w0.254: 9.271,13.106 44.272,13.106 44.272,45.314 9.271,45.314 9.271,45.339 9.271,13.106 ; 15.011,47.015 15.011,47.041 15.011,62.128 56.718,62.128 56.718,66.065 59.893,66.065 61.417,66.065 61.417,29.337 61.417,27.711 46.685,27.711 46.05,27.711 46.05,47.015 15.011,47.015
  text "BAT+" at 22.733,59.766 h1.02
  text "BAT-" at 22.784,57.201 h1.02
  text "BZ+" at 51.41,56.566 h1.02 r90
  text "BZ-" at 54.153,56.515 h1.02 r90
  text "A" at 19.575,53.162 h1.02
  text "BAT" at 57.353,51.003 h1.02 r90
  text "B" at 19.575,50.775 h1.02
  text "GND" at 21.606,47.93 h1.02
  text "PS" at 57.353,46.152 h1.02 r90
  text "GND" at 20.853,42.316 h1.02 r90
  text "RX" at 23.424,42.316 h1.02 r90
  text "TX" at 25.994,42.316 h1.02 r90
  text "BOOT" at 28.565,42.316 h1.02 r90
  text "EN" at 31.135,42.316 h1.02 r90
  text "VCC" at 33.706,42.316 h1.02 r90
Mechanical 1:
  lines w0.254: 35.306,12.573 35.306,15.011 36.195,15.011 ; 46.914,63.424 46.914,59.563 47.955,59.563 ; 46.99,37.236 46.99,37.262 ; 50.385,34.803 50.394,34.803 ; 50.394,37.211 50.394,37.262